# Altium PCB main_Bord.PcbDoc
Units mil, origin at the board's own origin, x right, y up, seen from the top; angles counter-clockwise.
Board outline 6049.15 x 6445.66 mil, 2 copper layers (Top Layer, Bottom Layer), stack 61.855 mil thick; 92 components, 59 nets, 168 pads, 74 vias.
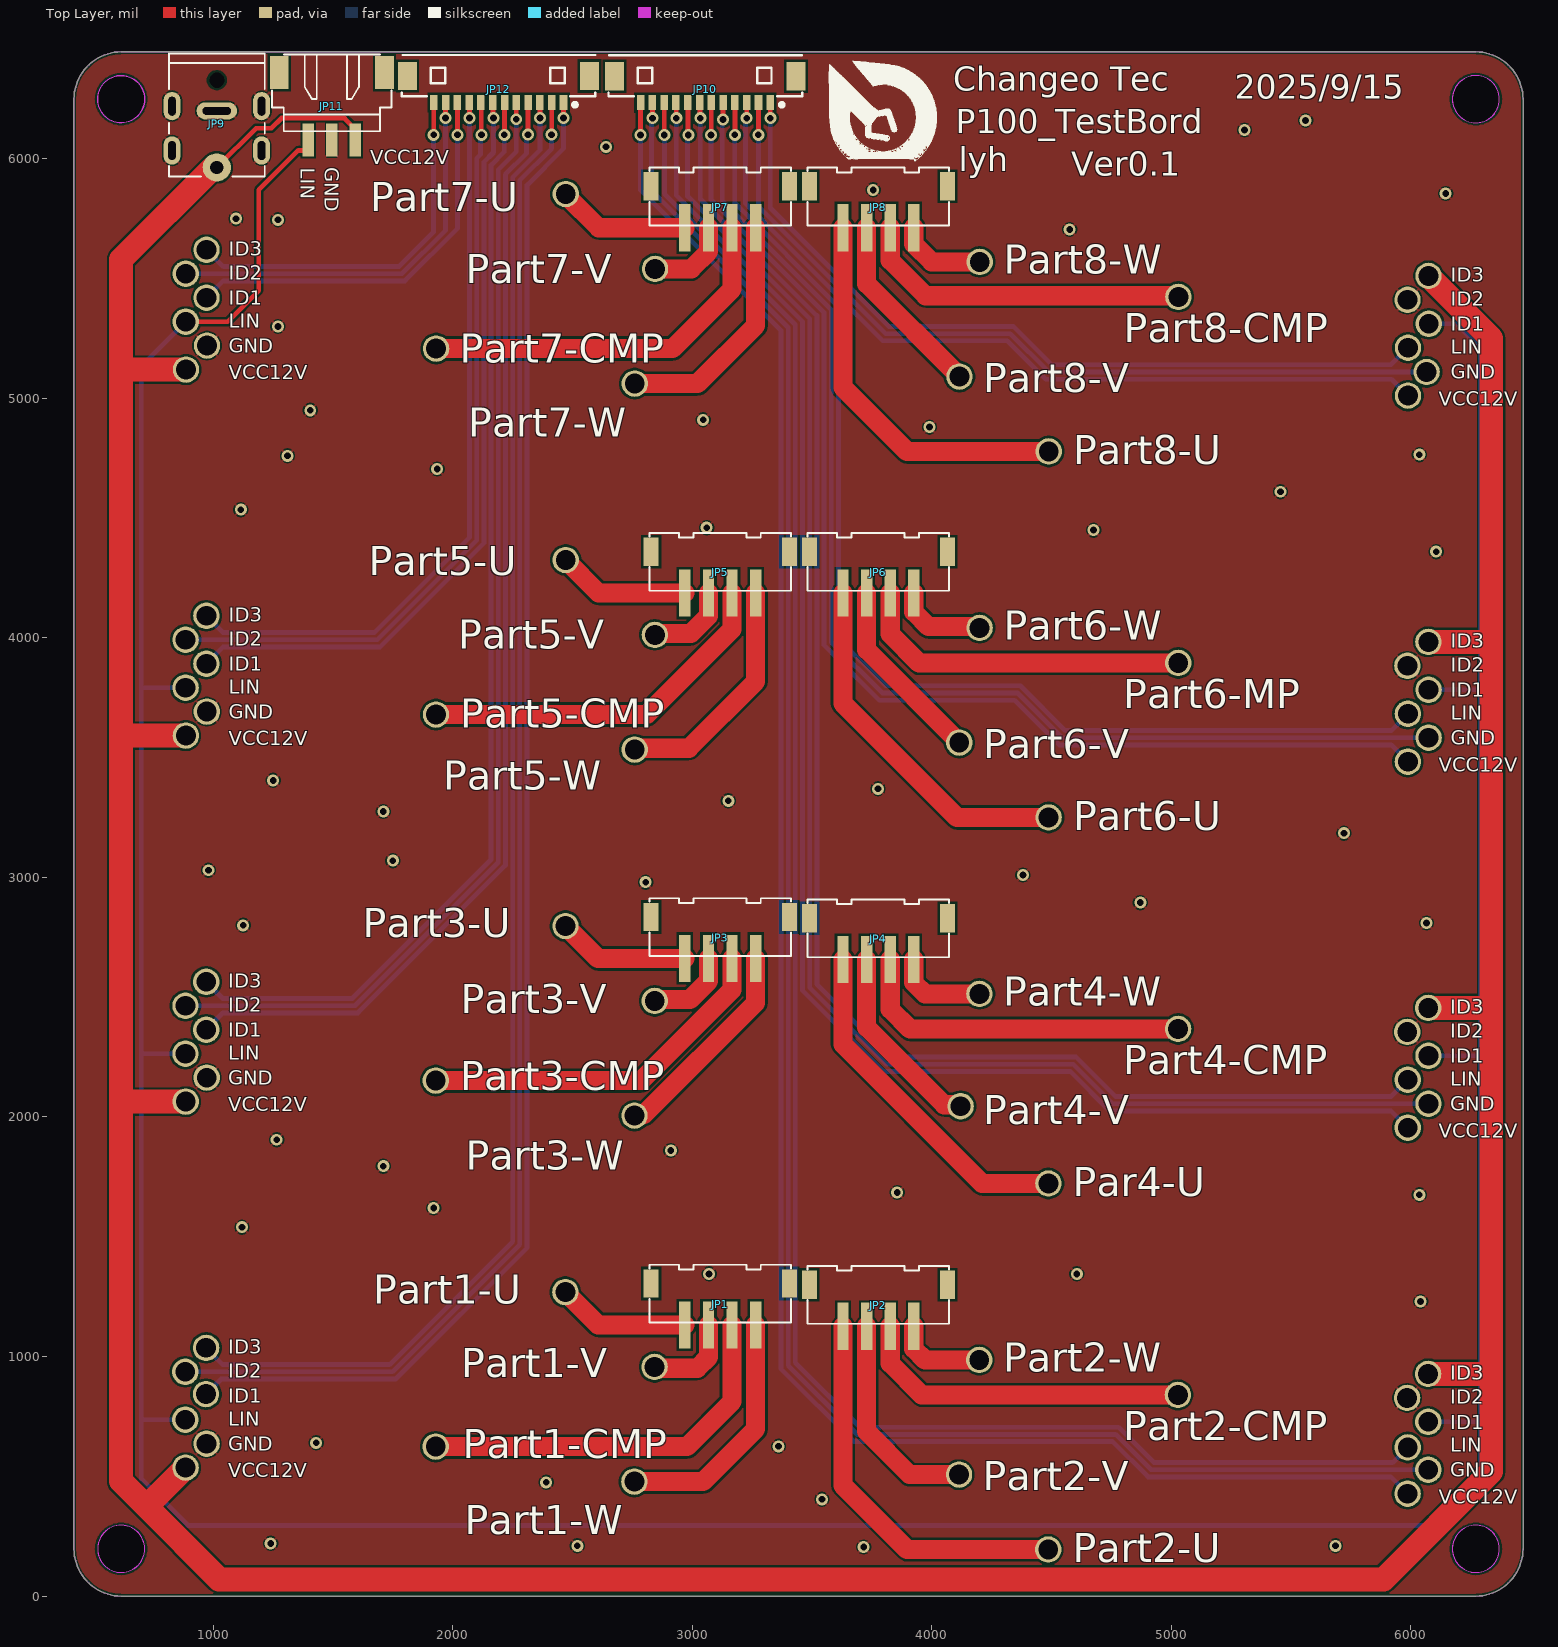
[diagram p0: Top Layer view]
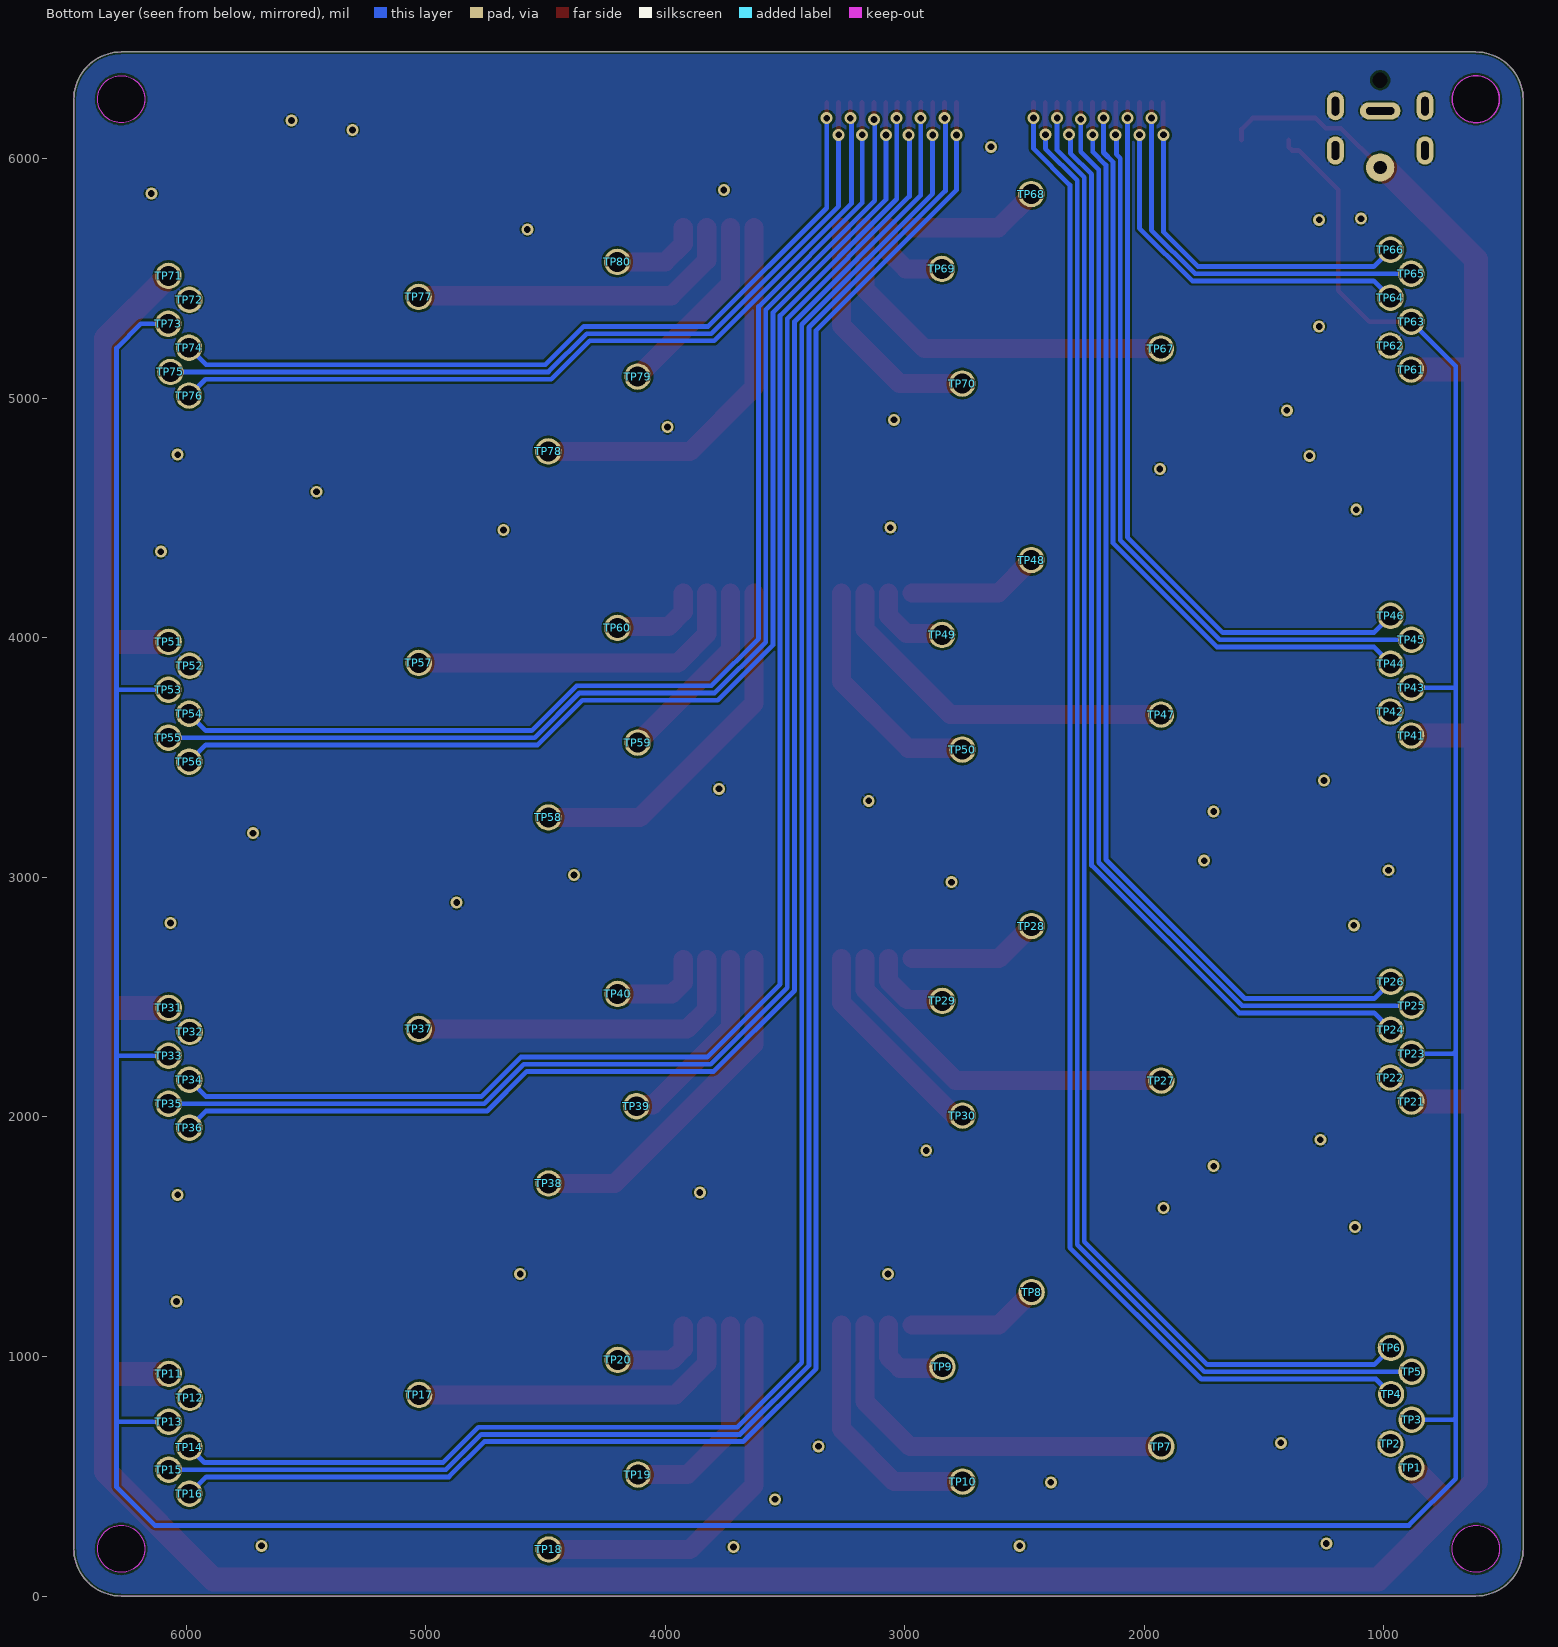
[diagram p1: Bottom Layer view, seen from below]
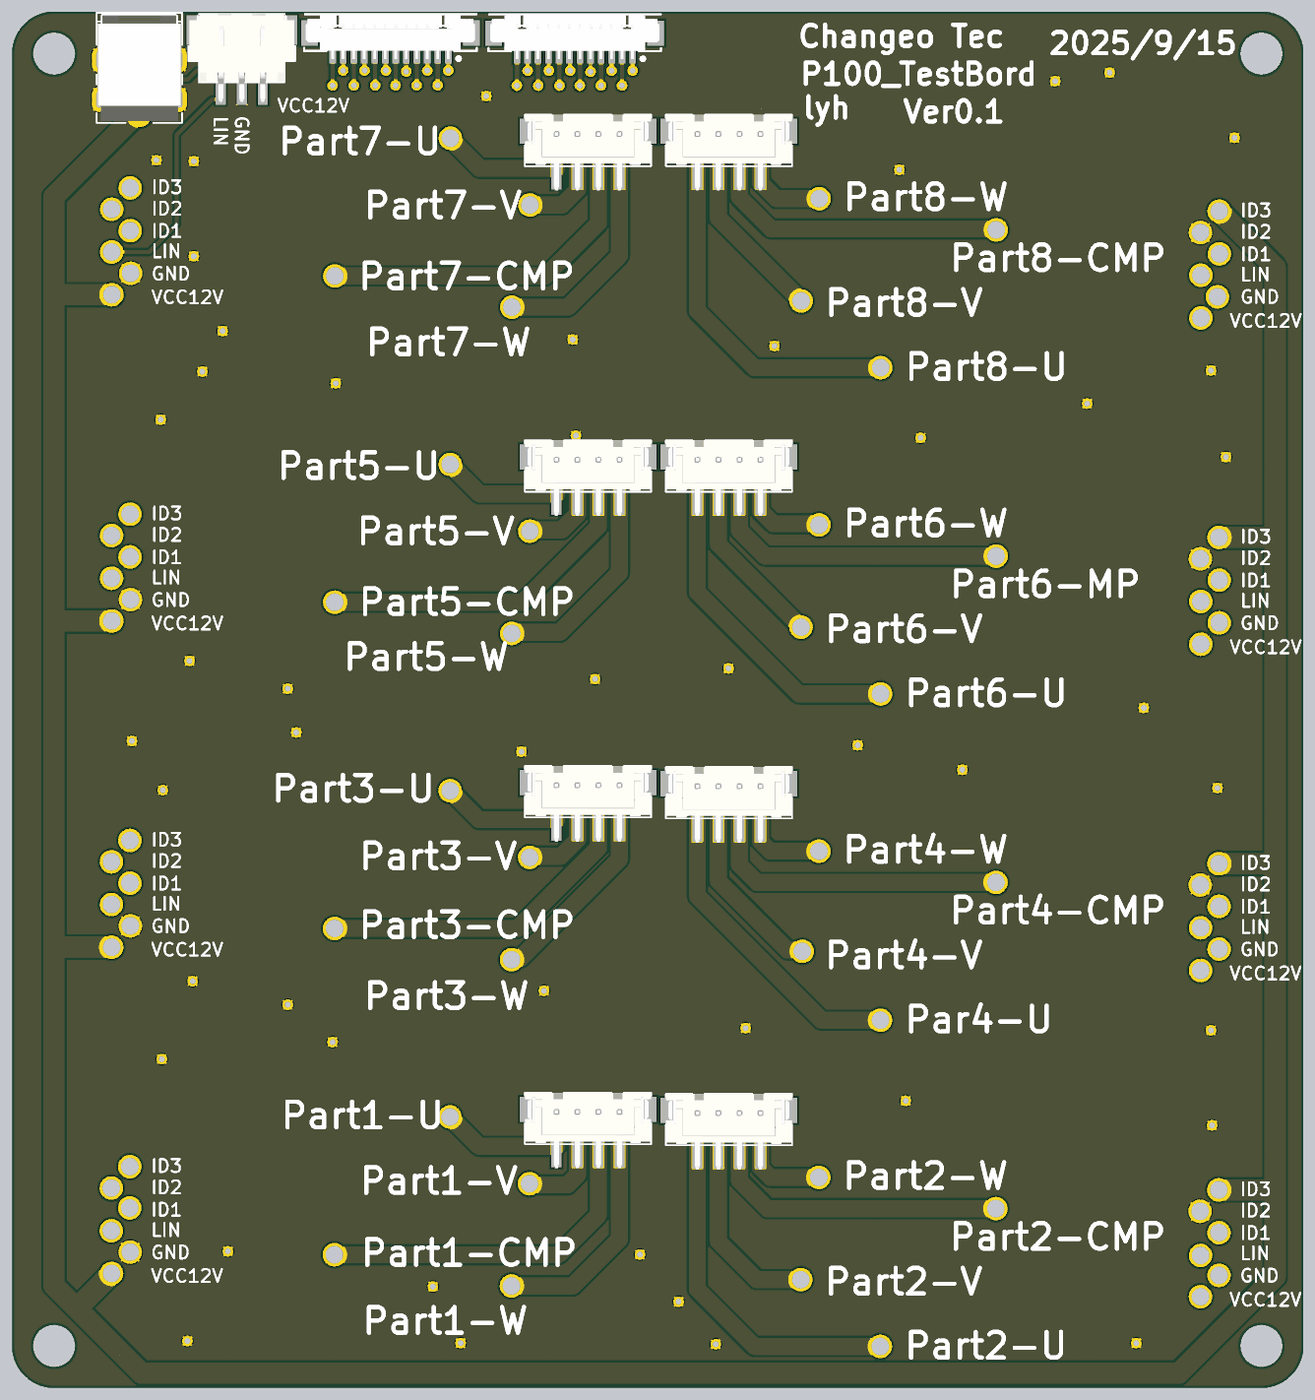
[diagram p2: 3D render of the assembled board from above, using the file's embedded part models]

## Layer stack, top to bottom
Top Solder: solder mask 0.4, Solder Resist, Dk 3.5
Top Layer: signal copper 1.4
Dielectric 1: dielectric 59.0551, FR-4, Dk 4.8
Bottom Layer: signal copper 1.4
Bottom Solder: solder mask 0.4, Solder Resist, Dk 3.5

## Board outline
418.65,197.1 418.65,6249.06 cw(c615.5,6249.06) 615.5,6445.91 6270.95,6445.91 cw(c6270.95,6249.06) 6467.8,6249.06 6467.8,197.1 cw(c6270.95,197.1) 6270.95,0.25 615.5,0.25 cw(c615.5,197.1)
cut-out: 615.5,6150.63 cw(c615.5,6249.06) 517.07,6249.06 cw(c615.5,6249.06) 615.5,6347.48 cw(c615.5,6249.06) 713.92,6249.06 cw(c615.5,6249.06)
cut-out: 6172.52,6249.06 ccw(c6270.95,6249.06) 6270.95,6150.63 ccw(c6270.95,6249.06) 6369.37,6249.06 ccw(c6270.95,6249.06) 6270.95,6347.48 ccw(c6270.95,6249.06)
cut-out: 6172.52,197.1 ccw(c6270.95,197.1) 6270.95,98.68 ccw(c6270.95,197.1) 6369.37,197.1 ccw(c6270.95,197.1) 6270.95,295.53 ccw(c6270.95,197.1)
cut-out: 517.07,197.1 ccw(c615.5,197.1) 615.5,98.68 ccw(c615.5,197.1) 713.92,197.1 ccw(c615.5,197.1) 615.5,295.53 ccw(c615.5,197.1)

## Design rules (kind name [scope] priority, off if disabled: settings)
Clearance [All] p1: gap=10 ignorepadtopadclearanceinfootprint=FALSE except(0: Arc-Hole Track-Hole SMDPad-Hole THPad-Hole Via-Hole Fill-Hole Poly-Hole Region-Hole Text-Hole)
PolygonConnect [All] p1: connectstyle=Relief reliefconductorwidth=10 reliefentries=4 polygonreliefangle="45 Angle" airgapwidth=6
RoutingVias [All] p1: holewidth=28 width=50 viastyle="Through Hole" minholewidth=28 minwidth=50 maxholewidth=28 maxwidth=50
SilkToSolderMaskClearance [IsPad] p1: minsilkscreentomaskgap=0 clearancetoexposedcopper=TRUE
SolderMaskExpansion [All] p1: expansion=4 istentingtop=FALSE
Width [All] p1: maxlimit=100 minlimit=8 preferedwidth=10
29 further rules are at their usual default settings.

## Components (designator, comment, footprint, x,y, rotation, side; value= is the part's Value field where it differs from the comment)
JP1 "HDR-1X4" XH2.54-LS-4P 3116.53,1265 r0 top
JP2 "HDR-1X4" XH2.54-LS-4P 3776.77,1260 r0 top
JP3 "HDR-1X4" XH2.54-LS-4P 3116.53,2795 r0 top
JP4 "HDR-1X4" XH2.54-LS-4P 3776.77,2790 r0 top
JP5 "HDR-1X4" XH2.54-LS-4P 3116.53,4320 r0 top
JP6 "HDR-1X4" XH2.54-LS-4P 3776.77,4320 r0 top
JP7 "HDR-1X4" XH2.54-LS-4P 3116.53,5845 r0 top
JP8 "HDR-1X4" XH2.54-LS-4P 3776.77,5845 r0 top
JP9 "HDR-1X2" DC-005P 1015,6180.31 r180 top
JP10 "HDR-1X12" "MX 1.25-WS-12P" 3054.21,6345 r180 top
JP11 "HDR-1X3" XH2.54-WS-3P 1495,6275 r180 top
JP12 "HDR-1X12" "MX 1.25-WS-12P" 2190.91,6345.65 r180 top
TP1 "P100_H2" P100_H2 884.57,536.34 r180 bottom
TP2 "P100_H2" P100_H2 972.15,636.34 r180 bottom
TP3 "P100_H2" P100_H2 883.57,736.34 r180 bottom
TP4 "P100_H2" P100_H2 969.75,843.15 r180 bottom
TP5 "P100_H2" P100_H2 883.57,936.34 r180 bottom
TP6 "P100_H2" P100_H2 970.18,1036.34 r180 bottom
TP7 "P100_H5" P100_H5 1928.7,624.1 r180 bottom
TP8 "P100_H5" P100_H5 2470.03,1269.23 r180 bottom
TP9 "P100_H5" P100_H5 2842.5,956.69 r180 bottom
TP10 "P100_H5" P100_H5 2758.07,477.86 r90 bottom
TP11 "P100_H2" P100_H2 6071.25,927.52 r180 bottom
TP12 "P100_H2" P100_H2 5983.67,827.52 r90 bottom
TP13 "P100_H2" P100_H2 6072.25,727.52 r90 bottom
TP14 "P100_H2" P100_H2 5986.07,620.7 r90 bottom
TP15 "P100_H2" P100_H2 6072.25,527.52 r90 bottom
TP16 "P100_H2" P100_H2 5985.64,427.52 r90 bottom
TP17 "P100_H5" P100_H5 5027.12,839.76 r90 bottom
TP18 "P100_H5" P100_H5 4485.79,194.63 r90 bottom
TP19 "P100_H5" P100_H5 4113.32,507.17 r90 bottom
TP20 "P100_H5" P100_H5 4197.75,986 r90 bottom
TP21 "P100_H2" P100_H2 885.18,2064.22 r90 bottom
TP22 "P100_H2" P100_H2 972.77,2164.22 r90 bottom
TP23 "P100_H2" P100_H2 884.18,2264.22 r90 bottom
TP24 "P100_H2" P100_H2 970.8,2364.22 r90 bottom
TP25 "P100_H2" P100_H2 884.18,2464.22 r90 bottom
TP26 "P100_H2" P100_H2 970.8,2564.23 r90 bottom
TP27 "P100_H5" P100_H5 1929.32,2151.98 r90 bottom
TP28 "P100_H5" P100_H5 2470.65,2797.11 r90 bottom
TP29 "P100_H5" P100_H5 2843.12,2484.58 r90 bottom
TP30 "P100_H5" P100_H5 2758.69,2005.74 r90 bottom
TP31 "P100_H2" P100_H2 6071.87,2455.4 r90 bottom
TP32 "P100_H2" P100_H2 5984.28,2355.4 r90 bottom
TP33 "P100_H2" P100_H2 6072.87,2255.4 r90 bottom
TP34 "P100_H2" P100_H2 5986.25,2155.4 r90 bottom
TP35 "P100_H2" P100_H2 6072.87,2055.4 r90 bottom
TP36 "P100_H2" P100_H2 5986.25,1955.4 r90 bottom
TP37 "P100_H5" P100_H5 5027.73,2367.65 r90 bottom
TP38 "P100_H5" P100_H5 4486.4,1722.51 r90 bottom
TP39 "P100_H5" P100_H5 4120,2045 r90 bottom
TP40 "P100_H5" P100_H5 4198.36,2513.89 r90 bottom
TP41 "P100_H2" P100_H2 885.8,3592.11 r90 bottom
TP42 "P100_H2" P100_H2 973.38,3692.11 r90 bottom
TP43 "P100_H2" P100_H2 884.8,3792.11 r90 bottom
TP44 "P100_H2" P100_H2 971.41,3892.11 r90 bottom
TP45 "P100_H2" P100_H2 884.8,3992.11 r90 bottom
TP46 "P100_H2" P100_H2 971.41,4092.11 r90 bottom
TP47 "P100_H5" P100_H5 1929.93,3679.87 r90 bottom
TP48 "P100_H5" P100_H5 2471.26,4325 r90 bottom
TP49 "P100_H5" P100_H5 2843.73,4012.46 r90 bottom
TP50 "P100_H5" P100_H5 2759.3,3533.63 r90 bottom
TP51 "P100_H2" P100_H2 6072.48,3983.29 r90 bottom
TP52 "P100_H2" P100_H2 5984.9,3883.29 r90 bottom
TP53 "P100_H2" P100_H2 6073.48,3783.29 r90 bottom
TP54 "P100_H2" P100_H2 5986.87,3683.29 r90 bottom
TP55 "P100_H2" P100_H2 6073.48,3583.29 r90 bottom
TP56 "P100_H2" P100_H2 5986.87,3483.29 r90 bottom
TP57 "P100_H5" P100_H5 5028.35,3895.53 r90 bottom
TP58 "P100_H5" P100_H5 4487.02,3250.4 r90 bottom
TP59 "P100_H5" P100_H5 4114.55,3562.94 r90 bottom
TP60 "P100_H5" P100_H5 4198.98,4041.77 r90 bottom
TP61 "P100_H2" P100_H2 886.41,5119.99 r90 bottom
TP62 "P100_H2" P100_H2 974,5220 r90 bottom
TP63 "P100_H2" P100_H2 885.41,5320 r90 bottom
TP64 "P100_H2" P100_H2 972.03,5420 r90 bottom
TP65 "P100_H2" P100_H2 885.41,5520 r90 bottom
TP66 "P100_H2" P100_H2 972.03,5620 r90 bottom
TP67 "P100_H5" P100_H5 1930.55,5207.75 r90 bottom
TP68 "P100_H5" P100_H5 2471.88,5852.89 r90 bottom
TP69 "P100_H5" P100_H5 2844.35,5540.35 r90 bottom
TP70 "P100_H5" P100_H5 2759.91,5061.51 r90 bottom
TP71 "P100_H2" P100_H2 6073.1,5511.18 r90 bottom
TP72 "P100_H2" P100_H2 5985.51,5411.17 r90 bottom
TP73 "P100_H2" P100_H2 6074.1,5311.17 r90 bottom
TP74 "P100_H2" P100_H2 5987.48,5211.17 r90 bottom
TP75 "P100_H2" P100_H2 6065,5110 r90 bottom
TP76 "P100_H2" P100_H2 5987.48,5011.17 r90 bottom
TP77 "P100_H5" P100_H5 5028.96,5423.42 r90 bottom
TP78 "P100_H5" P100_H5 4487.63,4778.28 r90 bottom
TP79 "P100_H5" P100_H5 4115.16,5090.82 r90 bottom
TP80 "P100_H5" P100_H5 4199.59,5569.66 r90 bottom

## Footprints (in the part's own frame and the unit in brackets; to place one, negate y for a bottom-side part, rotate by r counter-clockwise, add the part's x,y. Pads: shape width x height; smd on the part's side, far side on the other; paste and mask are expansions set on the pad)
DC-005P [mm] "13mm*10mm*10mm(长*宽*高)"
  oval 1.8x3 hole 0.8 slot 2 at 90 deg unplated: 0(-4.75,3.7) 0(-4.75,-1) 0(4.75,3.7) 0(4.75,-1)
  round 3 hole 1.4 unplated: 1(0,5.5)
  oval 4.3x1.8 hole 0.8 slot 3 at 0 deg unplated: 2(0,-0.5)
  round 0 hole 1.6 unplated: 4(0,-3.75)
  silkscreen extent -5.08,-6.6 5.08,6.48, body extent -5,-6.5 5,6.3, height 10.15
"MX 1.25-WS-12P" [mm] "长：20.15mm，宽：4.2mm，高：3.4mm"
  rect 2x3 smd: 0(-9.632,0) 0(9.632,0)
  rect 0.8x1.6 smd: 1(-6.889,2.811) 2(-5.639,2.811) 3(-4.389,2.811) 4(-3.139,2.811) 5(-1.889,2.811) 6(-0.639,2.811) 7(0.611,2.811) 8(1.861,2.811) 9(3.111,2.811) 10(4.361,2.811) 11(5.611,2.811) 12(6.861,2.811)
  silkscreen extent -10.27,-2.23 10.27,3.25, body extent -10.07,-2.1 10.07,3.09, height 3.4
P100_H2 [mm] "P100系列探针H2"
  round 2.8 hole 2.1: 1(0,0)
  body extent -0.94,-0.95 0.94,0.95, height 36
P100_H5 [mm] "P100系列探针H53"
  round 2.8 hole 2.1: 1(0,0)
  body extent -1.25,-1.24 1.25,1.24, height 36
XH2.54-LS-4P [mm] "长：15mm，宽：6mm，高：8.3mm"
  rect 1.6x3 smd: 0(-7.326,1.016) 0(7.326,1.016)
  rect 1.2x5 smd: 1(-3.75,-3.383) 2(-1.25,-3.383) 3(1.25,-3.383) 4(3.75,-3.383)
  silkscreen extent -7.5,-3.13 7.5,3, body extent -7.5,-6 7.5,3, height 8
XH2.54-WS-3P [mm] "长：12.5mm，宽：8mm，高：6.1mm"
  rect 2x3.5 smd: 0(-5.577,-2.15) 0(5.577,-2.15)
  rect 1.2x3.5 smd: 1(-2.5,4.981) 2(0,4.981) 3(2.5,4.981)
  silkscreen extent -6.35,-4.06 6.35,4.06, body extent -6.25,-4 6.25,6.42, height 6.05

## Part data
JP1 JP2 JP3 JP4 JP5 JP6 JP7 JP8: library part "Header 4", "4P接插件", BOM名称=4P接插件, 学习资源=www.ooocke.com, 版权归属=源创客
JP9: library part "Header 2", "2P接插件", BOM名称=2P接插件, 学习资源=www.ooocke.com, 版权归属=源创客
JP10 JP12: library part "Header 12", "12P接插件", BOM名称=12P接插件, 学习资源=www.ooocke.com, 版权归属=源创客
JP11: library part "Header 3", "3P接插件", BOM名称=3P接插件, 学习资源=www.ooocke.com, 版权归属=源创客
TP1 TP2 TP3 TP4 TP5 TP6 TP7 TP8 TP9 TP10 TP11 TP12 TP13 TP14 TP15 TP16 TP17 TP18 TP19 TP20 TP21 TP22 TP23 TP24 TP25 TP26 TP27 TP28 TP29 TP30 TP31 TP32 TP33 TP34 TP35 TP36 TP37 TP38 TP39 TP40 TP41 TP42 TP43 TP44 TP45 TP46 TP47 TP48 TP49 TP50 TP51 TP52 TP53 TP54 TP55 TP56 TP57 TP58 TP59 TP60 TP61 TP62 TP63 TP64 TP65 TP66 TP67 TP68 TP69 TP70 TP71 TP72 TP73 TP74 TP75 TP76 TP77 TP78 TP79 TP80: library part TEST, "测试点", BOM名称=测试点, 学习资源=www.ooocke.com, 版权归属=源创客

## Via types
v1: diameter 50, hole 28, Top Layer to Bottom Layer, 74 vias

## Nets (pads, with @x,y where several pads share a name; then routed paths per layer and width w, separated by ;. In a path a pad name is that pad's centre, name@x,y a point inside that pad or via, vN(x,y) a via of type N, cw(c..) or ccw(c..) an arc to the next point about the centre after c; other vN are vias at no path point)
GND: JP9.0 JP9.2 JP11.2 TP2.1 TP12.1 TP22.1 TP32.1 TP42.1 TP52.1 TP62.1 TP72.1
  other v1: 3715,205 2520,210 5685,210 1240,220 3541,404 2390,475 3360,625 1430,640 6040,1230 3070,1345 4605,1345 1120,1540 1920,1620 6035,1675 3855,1685 1710,1795 2910,1860 1265,1905 1125,2800 6065,2810 4870,2895 2805,2980 4380,3010 980,3030 1750,3070 5720,3185 1710,3275 3150,3320 3775,3370 1250,3405 6105,4360 4675,4450 3060,4460 1115,4535 5455,4610 1935,4705 1310,4760 6035,4765 3990,4880 3045,4910 1405,4950 1270,5300 4575,5705 1270,5745 1095,5750 6145,5855 3755,5870 2640,6050 5305,6120 5560,6160
LIN: JP11.3 TP3.1 TP13.1 TP23.1 TP33.1 TP43.1 TP53.1 TP63.1 TP73.1 | length 17964.7
  Top Layer w20: TP63.1 1060,5320 1190,5450 1190,5870 1354.67,6034.67 1382.95,6034.67 1396.57,6048.29 JP11.3
  Bottom Layer w20: TP3.1 708.66,736.34 700,745 ; TP23.1 710.78,2264.22 700,2275 ; TP43.1 702.11,3792.11 700,3790 ; TP63.1 700,5134.59 700,3790 ; TP13.1 6282.48,727.52 6290,720 ; TP33.1 6285.4,2255.4 6290,2260 ; TP53.1 6288.29,3783.29 6290,3785 ; TP73.1 6188.83,5311.17 6290,5210 6290,3785 ; 700,745 700,490 895,295 6130,295 6290,455 6290,720 ; 700,745 700,2275 ; 700,2275 700,3790 ; 6290,720 6290,2260 ; 6290,2260 6290,3785
PART1_CMP: JP1.3 TP7.1 | length 1634.8
  Top Layer w80: TP7.1 2978.1,624.1 3165.74,811.74 JP1.3
PART1_ID1: JP12.1 TP4.1 | length 6436.7
  Top Layer w20: v1(2462.13,6170) JP12.1
  Bottom Layer w20: TP4.1 1032.93,906.34 1761.34,906.34 2310,1455 2310,5890 2462.13,6042.13 v1(2462.13,6170)
PART1_ID2: JP12.2 TP5.1 | length 6439
  Top Layer w20: v1(2412.38,6100.53) 2412.91,6101.06 JP12.2
  Bottom Layer w20: TP5.1 1748.91,936.34 2280,1467.43 2280,5910 2412.38,6042.38 v1(2412.38,6100.53)
PART1_ID3: JP12.3 TP6.1 | length 6323.8
  Top Layer w20: v1(2363.7,6170) JP12.3
  Bottom Layer w20: TP6.1 1040.19,966.34 1736.49,966.34 2250,1479.85 2250,5922.43 2363.7,6036.13 v1(2363.7,6170)
PART1_U: JP1.1 TP8.1 | length 555.8
  Top Layer w80: TP8.1 2607.45,1131.81 JP1.1
PART1_V: JP1.2 TP9.1 | length 380.7
  Top Layer w80: TP9.1 2848.29,950.91 3020.45,950.91 3067.32,997.77 JP1.2
PART1_W: JP1.4 TP10.1 | length 1031.6
  Top Layer w80: TP10.1 3044.86,477.86 3264.17,697.17 JP1.4
PART2_CMP: JP2.3 TP17.1 | length 1410.9
  Top Layer w80: JP2.3 3825.98,971.64 3957.86,839.76 TP17.1
PART2_ID1: JP10.10 TP14.1 | length 8241.4
  Top Layer w20: JP10.10 2882.91,6233.95 2882.91,6099.74 v1(2883.3,6099.35)
  Bottom Layer w20: v1(2883.3,6099.35) 2883.3,5854.86 3430,5308.16 3430,974.85 3699.85,705 4779.85,705 4927.33,557.52 5922.89,557.52 TP14.1
PART2_ID2: JP10.11 TP15.1 | length 8361.8
  Top Layer w20: v1(2833.3,6169.35) JP10.11
  Bottom Layer w20: v1(2833.3,6169.35) 2830,6166.05 2830,5865.74 3400,5295.74 3400,962.43 3687.43,675 4767.43,675 4914.91,527.52 TP15.1
PART2_ID3: JP10.12 TP16.1 | length 8359.7
  Top Layer w20: v1(2783.3,6099.35) 2783.69,6099.74 2783.69,6233.95 JP10.12
  Bottom Layer w20: v1(2783.3,6099.35) 2783.3,5870.01 3370,5283.31 3370,950 3675,645 4755,645 4902.48,497.52 5915.64,497.52 TP16.1
PART2_U: JP2.1 TP18.1 | length 1632.3
  Top Layer w80: JP2.1 3629.13,461.87 3896.37,194.63 TP18.1
PART2_V: JP2.2 TP19.1 | length 899.8
  Top Layer w80: JP2.2 3727.56,687.44 3907.83,507.17 TP19.1
PART2_W: JP2.4 TP20.1 | length 386.7
  Top Layer w80: JP2.4 3924.41,1032.86 3971.27,986 TP20.1
PART3_CMP: JP3.3 TP27.1 | length 1524.4
  Top Layer w80: TP27.1 2786.98,2151.98 3165.74,2530.74 JP3.3
PART3_ID1: JP12.4 TP24.1 | length 4757.4
  Top Layer w20: v1(2313.96,6100.53) 2314.49,6101.06 JP12.4
  Bottom Layer w20: TP24.1 1040.8,2434.22 1604.22,2434.22 2220,3050 2220,5934.85 2308.22,6023.07 2308.22,6094.79 v1(2313.96,6100.53)
PART3_ID2: JP12.5 TP25.1 | length 4757.4
  Top Layer w20: v1(2265,6165) 2265.14,6165.14 2265.14,6234.86 JP12.5
  Bottom Layer w20: TP25.1 1591.8,2464.22 2190,3062.43 2190,5955 2265,6030 v1(2265,6165)
PART3_ID3: JP12.6 TP26.1 | length 4642.1
  Top Layer w20: v1(2215,6100) 2215.53,6100.53 2215.53,6234.47 JP12.6
  Bottom Layer w20: TP26.1 1040.8,2494.22 1579.37,2494.22 2160,3074.85 2160,5973.8 2215,6028.8 v1(2215,6100)
PART3_U: JP3.1 TP28.1 | length 554.3
  Top Layer w80: TP28.1 2605.95,2661.81 JP3.1
PART3_V: JP3.2 TP29.1 | length 352.9
  Top Layer w80: TP29.1 2848.9,2490.36 2990.2,2490.36 3067.32,2567.48 JP3.2
PART3_W: JP3.4 TP30.1 | length 885.4
  Top Layer w80: TP30.1 2764.47,2011.53 2798.53,2011.53 3264.17,2477.17 JP3.4
PART4_CMP: JP4.3 TP37.1 | length 1442.7
  Top Layer w80: JP4.3 3825.98,2450.02 3908.35,2367.65 TP37.1
PART4_ID1: JP10.7 TP34.1 | length 6572.3
  Top Layer w20: JP10.7 3031.72,6232.77 3031.72,6170.92 v1(3033.3,6169.35)
  Bottom Layer w20: v1(3033.3,6169.35) 3033.3,5832.14 3520,5345.44 3520,2555 3825,2250 4602.43,2250 4767.43,2085 5362.57,2085 5362.98,2085.4 5916.25,2085.4 TP34.1
PART4_ID2: JP10.8 TP35.1 | length 6691.9
  Top Layer w20: JP10.8 2982.12,6233.17 2982.12,6100.53 v1(2983.3,6099.35)
  Bottom Layer w20: v1(2983.3,6099.35) 2980,6096.05 2980,5843.02 3490,5333.02 3490,2540 3810,2220 4590,2220 4755,2055 5375,2055 5375.4,2055.4 TP35.1
PART4_ID3: JP10.9 TP36.1 | length 6689.2
  Top Layer w20: JP10.9 2932.51,6233.56 2932.51,6170.13 v1(2933.3,6169.35)
  Bottom Layer w20: v1(2933.3,6169.35) 2933.3,5847.29 3460,5320.59 3460,2527.57 3797.57,2190 4577.57,2190 4742.57,2025 5387.43,2025 5387.83,2025.4 5916.25,2025.4 TP36.1
PART4_U: JP4.1 TP38.1 | length 1451
  Top Layer w80: JP4.1 3629.13,2303.87 4210.49,1722.51 TP38.1
PART4_V: JP4.2 TP39.1 | length 811.3
  Top Layer w80: JP4.2 3727.56,2374.44 4051.21,2050.79 4114.21,2050.79 TP39.1
PART4_W: JP4.4 TP40.1 | length 389.4
  Top Layer w80: JP4.4 3924.41,2560.75 3971.27,2513.89 TP40.1
PART5_CMP: JP5.3 TP47.1 | length 1534.3
  Top Layer w80: TP47.1 2809.87,3679.87 3165.74,4035.74 JP5.3
PART5_ID1: JP12.7 TP44.1 | length 3224.8
  Top Layer w20: JP12.7 2168.43,6233.43 2168.43,6171.57 v1(2170,6170)
  Bottom Layer w20: TP44.1 1041.41,3962.11 1697.11,3962.11 2130,4395 2130,5986.23 2170,6026.23 v1(2170,6170)
PART5_ID2: JP12.8 TP45.1 | length 3224.1
  Top Layer w20: JP12.8 2118.82,6233.82 2118.82,6101.18 v1(2120,6100)
  Bottom Layer w20: TP45.1 1684.68,3992.11 2100,4407.43 2100,6002.61 2116.11,6018.72 2116.11,6096.11 v1(2120,6100)
PART5_ID3: JP12.9 TP46.1 | length 3108.1
  Top Layer w20: JP12.9 2069.21,6234.21 2069.21,6170.79 v1(2070,6170)
  Bottom Layer w20: TP46.1 1041.41,4022.11 1672.26,4022.11 2070,4419.85 v1(2070,6170)
PART5_U: JP5.1 TP48.1 | length 554.9
  Top Layer w80: TP48.1 2609.45,4186.81 JP5.1
PART5_V: JP5.2 TP49.1 | length 351.1
  Top Layer w80: TP49.1 2849.52,4018.25 2993.08,4018.25 3067.32,4092.48 JP5.2
PART5_W: JP5.4 TP50.1 | length 991.4
  Top Layer w80: TP50.1 2765.09,3539.41 2985.41,3539.41 3264.17,3818.17 JP5.4
PART6_CMP: JP6.3 TP57.1 | length 1423.1
  Top Layer w80: JP6.3 3825.98,4016.02 3946.47,3895.53 TP57.1
PART6_ID1: JP10.4 TP54.1 | length 4981.9
  Top Layer w20: v1(3177.26,6099.88) 3177.79,6100.41 JP10.4
  Bottom Layer w20: v1(3177.26,6099.88) 3177.26,5815.46 3610,5382.72 3610,3996.57 3806.57,3800 4369.85,3800 4556.56,3613.29 5916.87,3613.29 TP54.1
PART6_ID2: JP10.5 TP55.1 | length 5100.7
  Top Layer w20: v1(3128.3,6164.35) 3128.44,6164.48 3128.44,6234.21 JP10.5
  Bottom Layer w20: v1(3128.3,6164.35) 3125,6161.05 3125,5825.29 3580,5370.29 3580,3982.43 3792.43,3770 4357.43,3770 4544.14,3583.29 TP55.1
PART6_ID3: JP10.6 TP56.1 | length 5098.6
  Top Layer w20: v1(3078.3,6099.35) 3078.83,6099.88 3078.83,6233.81 JP10.6
  Bottom Layer w20: v1(3078.3,6099.35) 3078.3,5829.57 3550,5357.87 3550,3970 3780,3740 4345,3740 4531.71,3553.29 5916.87,3553.29 TP56.1
PART6_U: JP6.1 TP58.1 | length 1515.8
  Top Layer w80: JP6.1 3629.13,3725.87 4104.6,3250.4 TP58.1
PART6_V: JP6.2 TP59.1 | length 784.2
  Top Layer w80: JP6.2 3727.56,3949.93 TP59.1
PART6_W: JP6.4 TP60.1 | length 380.5
  Top Layer w80: JP6.4 3924.41,4108.59 3985.44,4047.56 4193.19,4047.56 TP60.1
PART7_CMP: JP7.3 TP67.1 | length 1594
  Top Layer w80: TP67.1 2917.75,5207.75 3165.74,5455.74 JP7.3
PART7_ID1: JP12.10 TP64.1 | length 1693.4
  Top Layer w20: JP12.10 2019.61,6234.61 2019.61,6100.39 v1(2020,6100)
  Bottom Layer w20: TP64.1 1042.03,5490 1800,5490 2020,5710 v1(2020,6100)
PART7_ID2: JP12.11 TP65.1 | length 1692.7
  Top Layer w20: v1(1970,6170) JP12.11
  Bottom Layer w20: TP65.1 1787.57,5520 1970,5702.43 v1(1970,6170)
PART7_ID3: JP12.12 TP66.1 | length 1577.4
  Top Layer w20: v1(1920,6100) 1920.39,6100.39 1920.39,6234.61 JP12.12
  Bottom Layer w20: TP66.1 1042.03,5550 1775.14,5550 1920,5694.85 v1(1920,6100)
PART7_U: JP7.1 TP68.1 | length 557.7
  Top Layer w80: TP68.1 2471.88,5849.12 2609.19,5711.81 JP7.1
PART7_V: JP7.2 TP69.1 | length 352.3
  Top Layer w80: TP69.1 2995.35,5540.35 3067.32,5612.31 JP7.2
PART7_W: JP7.4 TP70.1 | length 1012.4
  Top Layer w80: TP70.1 3021.51,5061.51 3264.17,5304.17 JP7.4
PART8_CMP: JP8.3 TP77.1 | length 1402
  Top Layer w80: JP8.3 3825.98,5576.02 3973.88,5428.13 5024.25,5428.13 TP77.1
PART8_ID1: JP10.1 TP74.1 | length 3402.4
  Top Layer w20: v1(3325.43,6169.35) JP10.1
  Bottom Layer w20: v1(3325.43,6169.35) 3325.43,5794.57 3820,5300 4339.85,5300 4499.85,5140 5916.31,5140 TP74.1
PART8_ID2: JP10.2 TP75.1 | length 3508.6
  Top Layer w20: v1(3275.68,6099.88) 3276.21,6100.41 JP10.2
  Bottom Layer w20: v1(3275.68,6099.88) 3275.68,5801.89 3807.57,5270 4327.43,5270 4487.43,5110 TP75.1
PART8_ID3: JP10.3 TP76.1 | length 3520.7
  Top Layer w20: v1(3227,6169.35) JP10.3
  Bottom Layer w20: v1(3227,6169.35) 3222.26,6164.6 3222.26,5812.89 3795.15,5240 4315,5240 4475,5080 5918.65,5080 TP76.1
PART8_U: JP8.1 TP78.1 | length 1635.9
  Top Layer w80: JP8.1 3629.13,5044.87 3895.72,4778.28 TP78.1
PART8_V: JP8.2 TP79.1 | length 781.5
  Top Layer w80: JP8.2 3727.56,5478.43 TP79.1
PART8_W: JP8.4 TP80.1 | length 373.4
  Top Layer w80: JP8.4 3924.41,5644.59 3999.3,5569.7 TP80.1 TP80.1
VCC12V: JP9.1 JP11.1 TP1.1 TP11.1 TP21.1 TP31.1 TP41.1 TP51.1 TP61.1 TP71.1 | length 19404.2
  Top Layer w20: JP9.1 1179.04,6127.81 1242.82,6127.81 1285,6170 1547.6,6170 1593.42,6124.17 JP11.1
  Top Layer w100: TP1.1 721.61,373.39 ; TP21.1 620.78,2064.22 615,2070 ; TP41.1 622.11,3592.11 615,3585 ; TP61.1 615,5119.99 ; JP9.1 1011.53,5960.31 996.31,5960.31 615,5579 615,5120 ; TP11.1 6332.48,927.52 6335,925 ; TP31.1 6330.4,2455.4 6335,2460 ; TP51.1 6331.71,3983.29 6335,3980 ; TP71.1 6335,5249.27 6335,3980 ; 615,2070 615,3585 ; 615,2070 615,480 721.61,373.39 ; 615,3585 615,5120 ; 721.61,373.39 1025,70 5885,70 6335,520 6335,925 ; 6335,925 6335,2460 ; 6335,2460 6335,3980
pads on no net: JP1.0 JP2.0 JP3.0 JP4.0 JP5.0 JP6.0 JP7.0 JP8.0 JP9.4 JP10.0 JP11.0 JP12.0

## Polygon pours and split planes (outlines as drawn)
GND on Bottom Layer "GND_L02_P000" (solid, remove dead copper, pour order 0): 418.65,197.1 418.65,6249.06 cw(c615.5,6249.06) 615.5,6445.91 6270.95,6445.91 cw(c6270.95,6249.06) 6467.8,6249.06 6467.8,197.1 cw(c6270.95,197.1) 6270.95,0.25 615.5,0.25 cw(c615.5,197.1)
GND on Top Layer "GND_L01_P001" (solid, remove dead copper, pour order 1): 418.65,197.1 418.65,6249.06 cw(c615.5,6249.06) 615.5,6445.91 6270.95,6445.91 cw(c6270.95,6249.06) 6467.8,6249.06 6467.8,197.1 cw(c6270.95,197.1) 6270.95,0.25 615.5,0.25 cw(c615.5,197.1)

## Keep-outs
Keep-Out Layer:
  circle w0.5: c6270.95,197.1 r98.43
  circle w0.5: c615.5,197.1 r98.43
  circle w0.5: c6270.95,6249.06 r98.43
  circle w0.5: c615.5,6249.06 r98.43
  lines w0.5: 418.65,197.1 ccw(c615.5,197.1) 615.5,0.25 6270.95,0.25 ccw(c6270.95,197.1) 6467.8,197.1 6467.8,6249.06 ccw(c6270.95,6249.06) 6270.95,6445.91 615.5,6445.91 ccw(c615.5,6249.06) 418.65,6249.06 418.65,197.1

## Silkscreen, mask and mechanical layers (free items; w line width, h text height)
Top Overlay:
  region: 2830 vertices and 111 holes, not listed, extent 3570.12,5988.93 4020.92,6408.97
  text "Changeo Tec" at 4090,6283.32 h100
  text "2025/9/15" at 5265,6250 h100
  text "P100_TestBord" at 4100,6106.66 h100
  text "VCC12V" at 1655,5977 h60
  text "GND" at 1466,5964 h60 r270
  text "LIN" at 1366,5962 h60 r270
  text "lyh" at 4112,5948.32 h100
  text "Ver0.1" at 4582,5930 h100
  text "Part7-U" at 1655,5781 h120
  text "ID3" at 1065,5595 h60
  text "Part8-W" at 4300,5520 h120
  text "ID2" at 1065,5495 h60
  text "ID3" at 6166.07,5486.18 h60
  text "Part7-V" at 2055,5481 h120
  text "ID1" at 1065,5390 h60
  text "ID2" at 6166.07,5386.18 h60
  text "LIN" at 1065,5295 h60
  text "ID1" at 6166.07,5281.18 h60
  text "Part8-CMP" at 4800,5235 h120
  text "GND" at 1065,5190 h60
  text "LIN" at 6166.07,5186.18 h60
  text "Part7-CMP" at 2030,5149 h120
  text "GND" at 6166.07,5081.18 h60
  text "VCC12V" at 1065,5080 h60
  text "Part8-V" at 4215,5025 h120
  text "VCC12V" at 6116.84,4968.66 h60
  text "Part7-W" at 2064,4840 h120
  text "Part8-U" at 4590,4725 h120
  text "Part5-U" at 1649,4261 h120
  text "ID3" at 1064.39,4067.11 h60
  text "Part6-W" at 4299.39,3992.11 h120
  text "ID2" at 1064.39,3967.11 h60
  text "ID3" at 6165.46,3958.29 h60
  text "Part5-V" at 2022,3955 h120
  text "ID1" at 1064.39,3862.11 h60
  text "ID2" at 6165.46,3858.29 h60
  text "LIN" at 1064.39,3767.11 h60
  text "ID1" at 6165.46,3753.29 h60
  text "Part6-MP" at 4799.39,3707.11 h120
  text "GND" at 1064.39,3662.11 h60
  text "LIN" at 6165.46,3658.29 h60
  text "Part5-CMP" at 2031,3624 h120
  text "GND" at 6165.46,3553.29 h60
  text "VCC12V" at 1064.39,3552.11 h60
  text "Part6-V" at 4214.39,3497.11 h120
  text "VCC12V" at 6116.23,3440.77 h60
  text "Part5-W" at 1960,3367 h120
  text "Part6-U" at 4589.39,3197.11 h120
  text "Part3-U" at 1624,2750 h120
  text "ID3" at 1063.77,2539.23 h60
  text "Part4-W" at 4298.77,2464.23 h120
  text "ID2" at 1063.77,2439.23 h60
  text "Part3-V" at 2033,2433 h120
  text "ID3" at 6164.84,2430.41 h60
  text "ID1" at 1063.77,2334.23 h60
  text "ID2" at 6164.84,2330.41 h60
  text "LIN" at 1063.77,2239.23 h60
  text "ID1" at 6164.84,2225.41 h60
  text "Part4-CMP" at 4798.77,2179.23 h120
  text "GND" at 1063.77,2134.23 h60
  text "LIN" at 6164.84,2130.41 h60
  text "Part3-CMP" at 2031,2111 h120
  text "GND" at 6164.84,2025.41 h60
  text "VCC12V" at 1063.77,2024.23 h60
  text "Part4-V" at 4213.77,1969.23 h120
  text "VCC12V" at 6115.61,1912.89 h60
  text "Part3-W" at 2055,1779 h120
  text "Par4-U" at 4588.77,1669.23 h120
  text "Part1-U" at 1667,1220 h120
  text "ID3" at 1063.16,1011.34 h60
  text "Part2-W" at 4298.16,936.34 h120
  text "Part1-V" at 2036,913 h120
  text "ID2" at 1063.16,911.34 h60
  text "ID3" at 6164.23,902.52 h60
  text "ID1" at 1063.16,806.34 h60
  text "ID2" at 6164.23,802.52 h60
  text "LIN" at 1063.16,711.34 h60
  text "ID1" at 6164.23,697.52 h60
  text "Part2-CMP" at 4798.16,651.34 h120
  text "GND" at 1063.16,606.34 h60
  text "LIN" at 6164.23,602.52 h60
  text "Part1-CMP" at 2041,576 h120
  text "GND" at 6164.23,497.52 h60
  text "VCC12V" at 1063.16,496.34 h60
  text "Part2-V" at 4213.16,441.34 h120
  text "VCC12V" at 6115,385 h60
  text "Part1-W" at 2049,258 h120
  text "Part2-U" at 4588.16,141.34 h120
Mechanical 1:
  circle w0.5: c615.5,6249.06 r98.43
  circle w0.5: c6270.95,197.1 r98.43
  circle w0.5: c6270.95,6249.06 r98.43
  circle w0.5: c615.5,197.1 r98.43
  lines w0.5: 418.65,197.1 ccw(c615.5,197.1) 615.5,0.25 6270.95,0.25 ccw(c6270.95,197.1) 6467.8,197.1 6467.8,6249.06 ccw(c6270.95,6249.06) 6270.95,6445.91 615.5,6445.91 ccw(c615.5,6249.06) 418.65,6249.06 418.65,197.1